# Altium PCB 175-00024_rev1, Backplane, 19-inch Rack_OLD.PcbDoc (part 2 of 3)
Units mil, origin at the board's own origin, x right, y up, seen from the top; angles counter-clockwise.
Board outline 8400 x 10183.07 mil, 7 copper layers (Top Layer (*.GTL), Mid-Layer 1, +24V, RTN, +12V, Signal GND, Bottom Layer); 183 components, 151 nets, 1419 pads, 357 vias.
Unrouted connection lines stored in the file: 135.
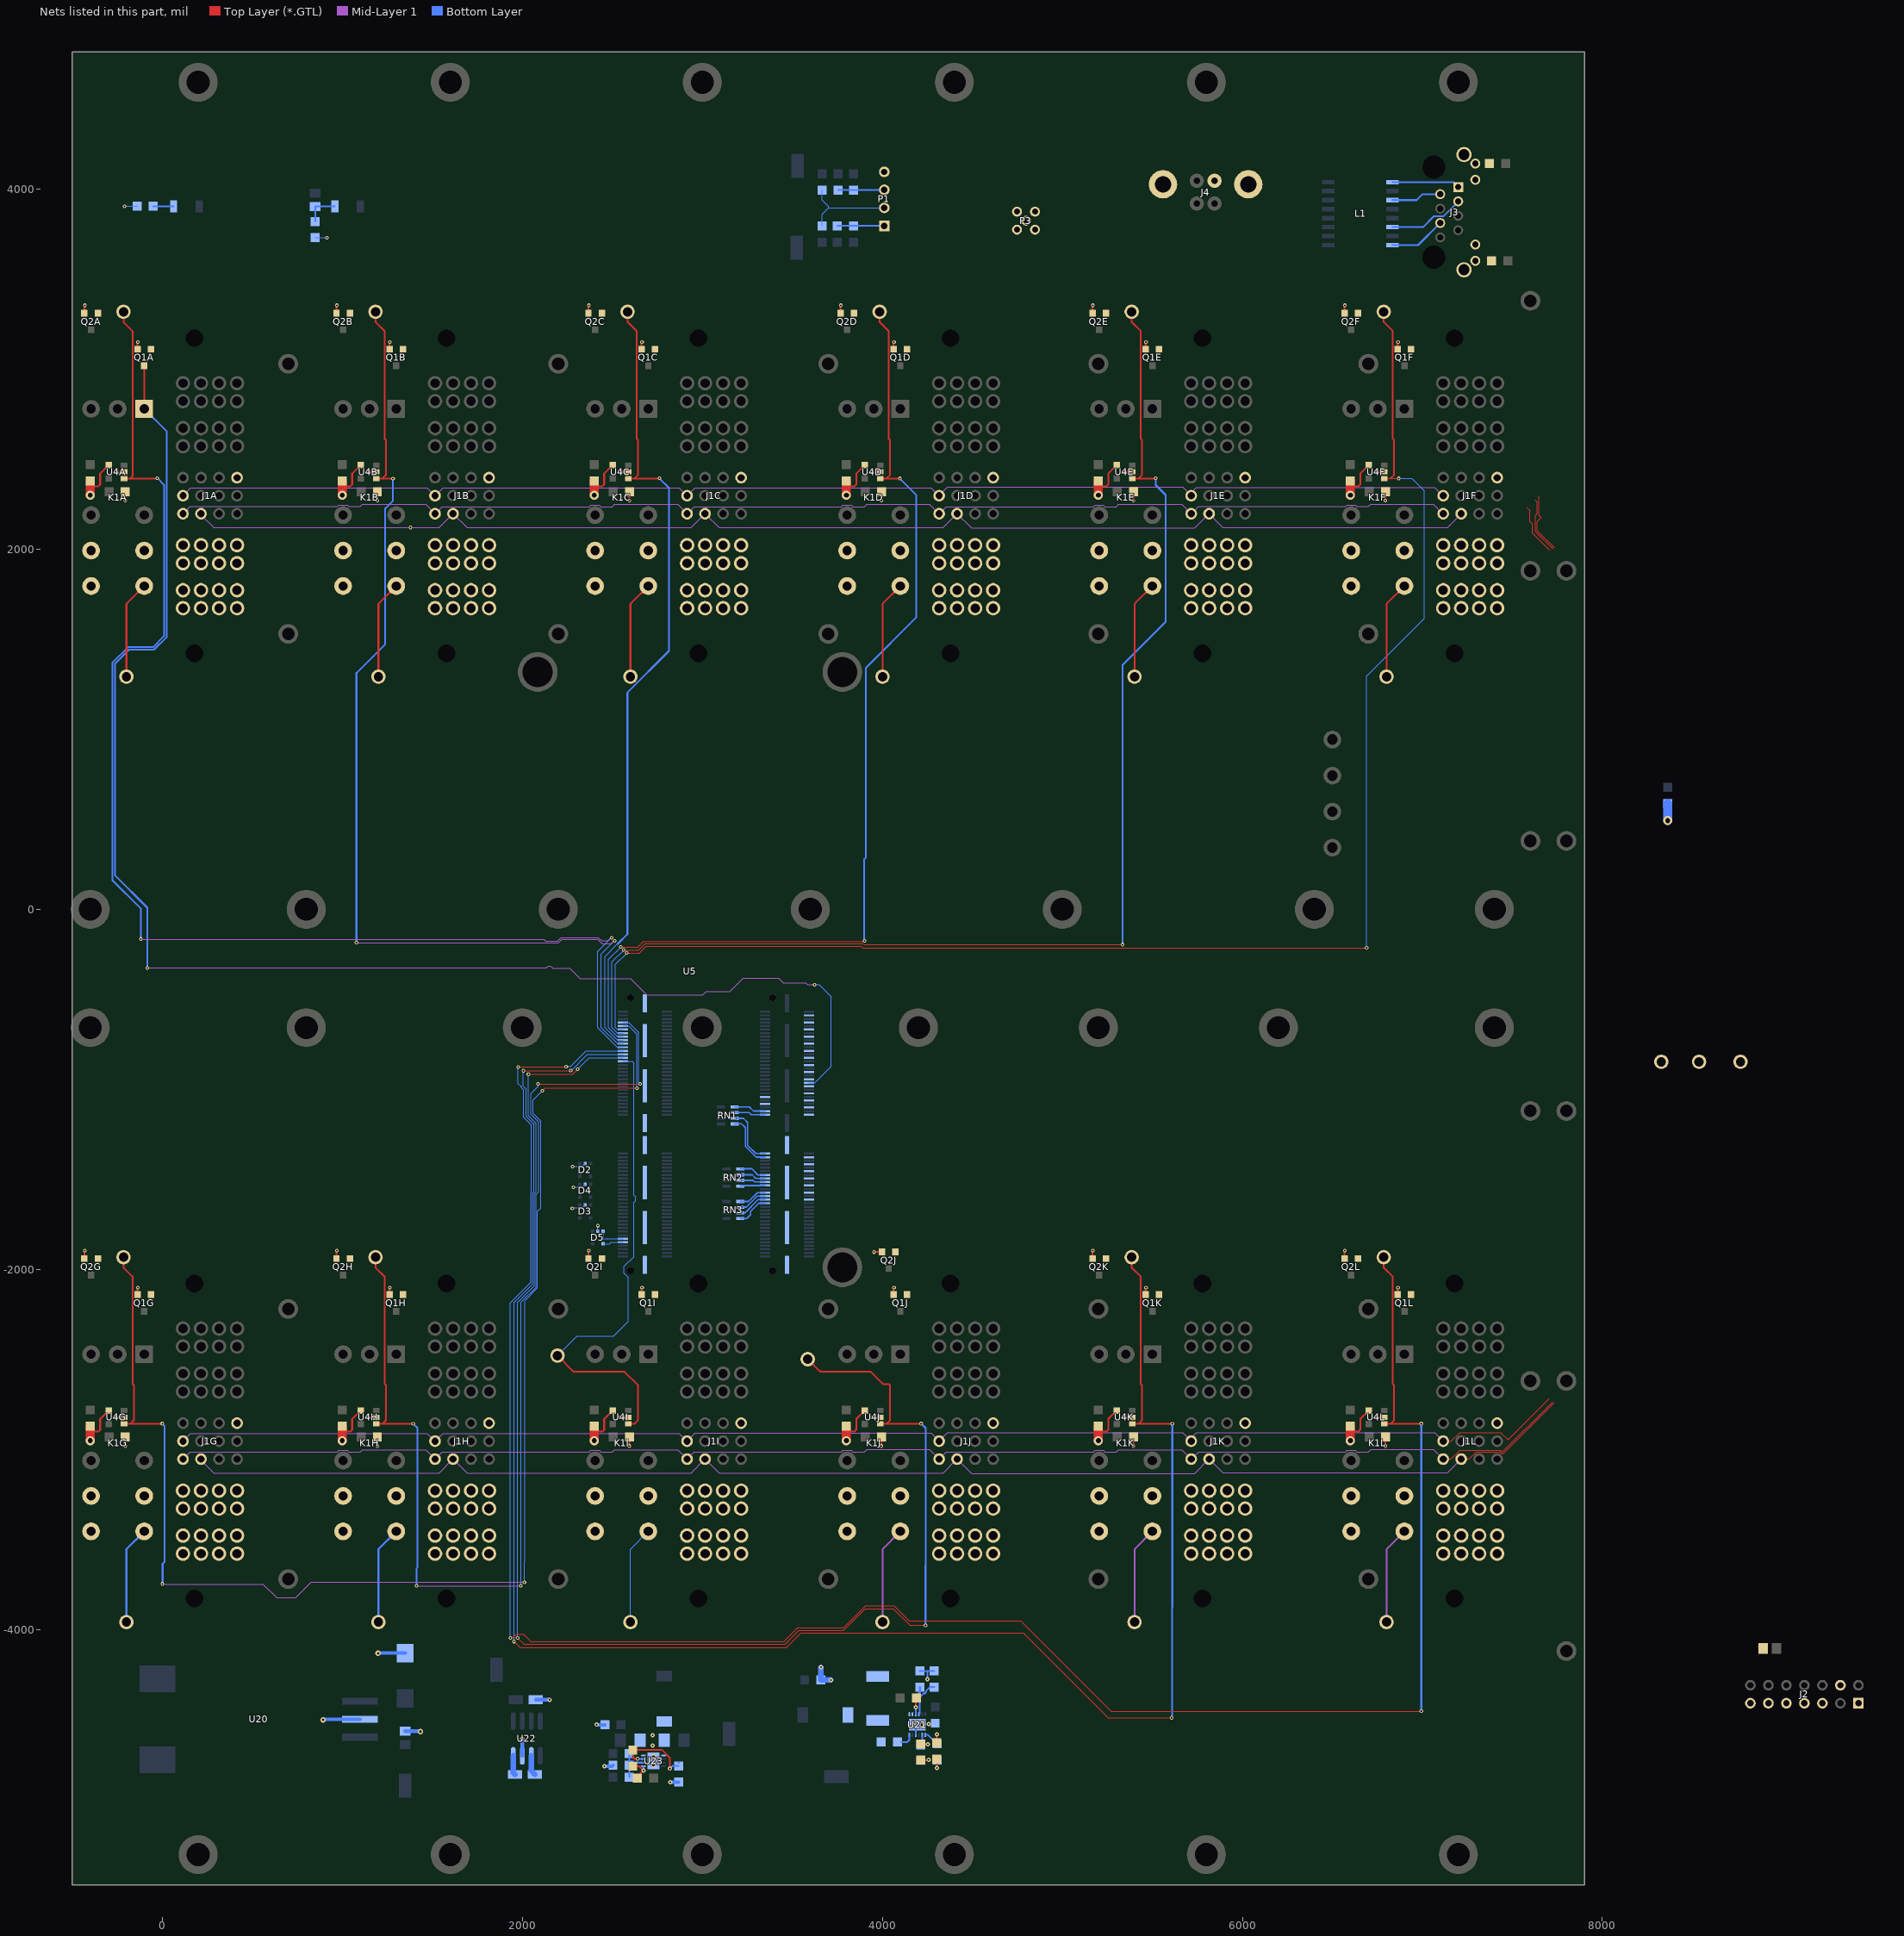
[diagram p7: the nets of this part, all layers, seen from the top]

## Via types
v1: diameter 20, hole 10, Top Layer (*.GTL) to Bottom Layer, 213 vias
v2: diameter 50, hole 28, Top Layer (*.GTL) to Bottom Layer, 87 vias
v3: diameter 24, hole 10, Top Layer (*.GTL) to Bottom Layer, 50 vias
v4: diameter 25.98, hole 12.99, Top Layer (*.GTL) to Bottom Layer, tented top, 4 vias
v5: diameter 30, hole 15, Top Layer (*.GTL) to Bottom Layer, 3 vias

## Nets (pads, with @x,y where several pads share a name; then routed paths per layer and width w, separated by ;. In a path a pad name is that pad's centre, name@x,y a point inside that pad or via, vN(x,y) a via of type N, cw(c..) or ccw(c..) an arc to the next point about the centre after c; other vN are vias at no path point) (continued)
GND: C2A.1 C2B.1 C2C.1 C2D.1 C2E.1 C2F.1 C2G.1 C2H.1 C2I.1 C2J.1 C2K.1 C2L.1 C3.1 C4.1 C10.2 C12.NEG C13.1 C14.1 C15.1 C16.1 C18.1 C19.1 D2.2 D3.2 D4.2 D5.2 J1A.12 J1B.12 J1C.12 J1D.12 J1E.12 J1F.12 J1G.12 J1H.12 J1I.12 J1J.12 J1K.12 J1L.12 J2.1 J2.4 J2.7 J2.9 J2.11 J2.13 J3.10 J3.11 J3.13 J3.14 J4.4 J4.5 J4.6 P1.2 P1.4 P3.2 P3.3 P3.4 P3.5 Q1A.2 Q1B.2 Q1C.2 Q1D.2 Q1E.2 Q1F.2 Q1G.2 Q1H.2 Q1I.2 Q1J.2 Q1K.2 Q1L.2 Q2A.2 Q2B.2 Q2C.2 Q2D.2 Q2E.2 Q2F.2 Q2G.2 Q2H.2 Q2I.2 Q2J.2 Q2K.2 Q2L.2 R1.2 R2.1 R3.1 R30.1 R31.1 R34.1 R38.1 R39.1 R40.1 TP1.1 TP2.1 TP3.1 U4A.2 U4B.2 U4C.2 U4D.2 U4E.2 U4F.2 U4G.2 U4H.2 U4I.2 U4J.2 U4K.2 U4L.2 U5.A121 U5.A122 U5.B4 U5.B8 U5.B12 U5.B16 U5.B20 U5.B24 U5.B28 U5.B32 U5.B36 U5.B40 U5.B44 U5.B48 U5.B49 U5.B52 U5.B53 U5.B56 U5.B60 U5.B64 U5.B68 U5.B72 U5.B76 U5.B80 U5.B84 U5.B88 U5.B122 U20.2 U21.4 U21.13 U22.3 U23.8 U23.9 | length 4356.3
  Top Layer (*.GTL) w10: Q2G.2@-432.41,-1940 v1@-432.41,-1898.66 ; Q2A.2@-432.4,3311.18 v1@-432.4,3352.52 ; v1(-260.01,-2821.26) U4G.2@-212.01,-2821.26 ; v1(-260,2429.92) U4A.2@-212,2429.92 ; v1(-205.01,-2981.26) C2G.1@-205.01,-2931.26 ; v1(-205,2269.92) C2A.1@-205,2319.92 ; Q1G.2@-137.41,-2140 -137.41,-2103.66 v1(-135.01,-2101.26) ; Q1A.2@-137.4,3111.18 -137.4,3147.52 v1(-135,3149.92) ; Q2H.2@967.59,-1940 v1@967.59,-1898.66 ; Q2B.2@967.6,3311.18 v1@967.6,3352.52 ; v1(1139.99,-2821.26) U4H.2@1187.99,-2821.26 ; v1(1140,2429.92) U4B.2@1188,2429.92 ; v1(1194.99,-2981.26) C2H.1@1194.99,-2931.26 ; v1(1195,2269.92) C2B.1@1195,2319.92 ; Q1H.2@1262.59,-2140 1262.59,-2103.66 v1(1264.99,-2101.26) ; Q1B.2@1262.6,3111.18 1262.6,3147.52 v1(1265,3149.92) ; Q2I.2@2367.59,-1940 v1@2367.59,-1898.66 ; Q2C.2@2367.6,3311.18 v1@2367.6,3352.52 ; v1(2539.99,-2821.26) U4I.2@2587.99,-2821.26 ; v1(2540,2429.92) U4C.2@2588,2429.92 ; v1(2594.99,-2981.26) C2I.1@2594.99,-2931.26 ; v1(2595,2269.92) C2C.1@2595,2319.92 ; Q1I.2@2662.59,-2140 2662.59,-2103.66 v1(2664.99,-2101.26) ; Q1C.2@2662.6,3111.18 2662.6,3147.52 v1(2665,3149.92) ; Q2D.2@3767.6,3311.18 v1@3767.6,3352.52 ; v1(3939.99,-2821.26) U4J.2@3987.99,-2821.26 ; v1(3940,2429.92) U4D.2@3988,2429.92 ; v1(3954.5,-1903.94) 3955.76,-1902.68 Q2J.2@3998.1,-1902.68 ; v1(3994.99,-2981.26) C2J.1@3994.99,-2931.26 ; v1(3995,2269.92) C2D.1@3995,2319.92 ; Q1J.2@4062.59,-2140 4062.59,-2103.66 v1(4064.99,-2101.26) ; Q1D.2@4062.6,3111.18 4062.6,3147.52 v1(4065,3149.92) ; R34.1@4213.8,-4725.73 4255.8,-4725.73 v3(4256.8,-4724.73) ; C14.1@4301.8,-4630.73 4301.8,-4584.73 v3(4302.8,-4583.73) ; Q2K.2@5167.59,-1940 v1@5167.59,-1898.66 ; Q2E.2@5167.6,3311.18 v1@5167.6,3352.52 ; v1(5339.99,-2821.26) U4K.2@5387.99,-2821.26 ; v1(5340,2429.92) U4E.2@5388,2429.92 ; v1(5394.99,-2981.26) C2K.1@5394.99,-2931.26 ; v1(5395,2269.92) C2E.1@5395,2319.92 ; Q1K.2@5462.59,-2140 5462.59,-2103.66 v1(5464.99,-2101.26) ; Q1E.2@5462.6,3111.18 5462.6,3147.52 v1(5465,3149.92) ; Q2L.2@6567.59,-1940 v1@6567.59,-1898.66 ; Q2F.2@6567.6,3311.18 v1@6567.6,3352.52 ; v1(6739.99,-2821.26) U4L.2@6787.99,-2821.26 ; v1(6740,2429.92) U4F.2@6788,2429.92 ; v1(6794.99,-2981.26) C2L.1@6794.99,-2931.26 ; v1(6795,2269.92) C2F.1@6795,2319.92 ; Q1L.2@6862.59,-2140 6862.59,-2103.66 v1(6864.99,-2101.26) ; Q1F.2@6862.6,3111.18 6862.6,3147.52 v1(6865,3149.92)
  Bottom Layer w5: v1(-210,3905) R3.1@-140,3905 ; R2.1@850,3730 v1(915,3730) ; v1(2278,-1661.48) 2280.66,-1658.82 2332.53,-1658.82 2348.88,-1642.48 D3.2@2349.53,-1642.48 D3.2@2349.53,-1647.95 ; v1(2279,-1429.48) 2279.66,-1428.82 2332.53,-1428.82 2348.88,-1412.48 D2.2@2349.53,-1412.48 D2.2@2349.53,-1417.95 ; v1(2283,-1544.48) 2283.66,-1543.82 2332.53,-1543.82 2348.88,-1527.48 D4.2@2349.53,-1527.48 D4.2@2349.53,-1532.95 ; D5.2@2419.53,-1787.48 v1(2419.53,-1757.95) ; C3.1@3665,3795 3665,3860 3701,3896 ; C4.1@3665,3995 3665,3940 3701,3904 3701,3896 ; P1.2@4011,3896 3701,3896
  Bottom Layer w10: U21.4@4185.65,-4585.73 4185.65,-4537.51 U21.13@4194.51,-4528.65 ; R30.1@4208.8,-4230.73 4249.8,-4230.73 ; v3(4249.8,-4277.73) 4249.8,-4230.73 ; R31.1@4288.8,-4230.73 4249.8,-4230.73
  Bottom Layer w20: v5(894,-4502.48) 897.4,-4499.08 U20.2@1098,-4499.08 ; v5(1199,-4132.48) 1200,-4131.48 C12.NEG@1349,-4131.48 ; C10.2@1349,-4565.08 1431.6,-4565.08 v5(1434,-4567.48) ; U22.3@2000,-4701.94 v3(2000,-4607.48) ; C16.1@2075,-4390.48 v3(2152,-4390.48) ; v3(2412.98,-4529.08) 2413.98,-4530.08 R38.1@2458.98,-4530.08 ; v3(2456.98,-4760.08) 2498.98,-4760.08 R39.1@2503.98,-4755.08 ; v3(2821.98,-4848.08) R40.1@2867.98,-4848.08
  Bottom Layer w30: v3(3658.8,-4210.73) C13.1@3658.8,-4280.73 v3(3713.8,-4280.73)
  Bottom Layer w50: v2(8363,492.52) R1.2@8363,587.52
  other v1: -430.01,-1896.26 969.99,-1896.26 2369.99,-1896.26 5169.99,-1896.26 6569.99,-1896.26 -430,3354.92 970,3354.92 2370,3354.92 3770,3354.92 5170,3354.92 6570,3354.92
  other v3: 2725,-4645.08 2724,-4588.08 4258.8,-4525.73
  other v4: 2728.98,-4753.7 2728.98,-4706.46 4170.89,-4528.65 4218.13,-4528.65
GPS_DATA: J1A.1 J1B.1 J1C.1 J1D.1 J1E.1 J1F.1 J1G.1 J1H.1 J1I.1 J1J.1 J1K.1 J1L.1 P3.1 | length 15569.8
  Top Layer (*.GTL) w5: J1L.1@7115.5,-3053.94 7160.35,-3053.94 7208.35,-3005.94 7435.38,-3005.94 7444.38,-3014.94 7445,-3014.94 7723.73,-2736.21 ; 7624.84,2274.36 7638.43,2260.77 7638.43,2196.95 7629.09,2187.61 7629.09,2097.88 7631.73,2095.25 7723.73,2003.25
  Mid-Layer 1 w5: J1G.1@115.5,-3053.94 155.78,-3013.66 974.07,-3013.66 981.64,-3006.1 1027.79,-3006.1 1035.35,-3013.66 1100.92,-3013.66 1112.92,-3001.66 1463.22,-3001.66 J1H.1@1515.5,-3053.94 1554.78,-3014.66 2373.07,-3014.66 2381.64,-3006.1 2427.79,-3006.1 2436.35,-3014.66 2499.92,-3014.66 2512.16,-3002.43 2863.99,-3002.43 J1I.1@2915.5,-3053.94 2954.78,-3014.66 3773.07,-3014.66 3781.64,-3006.1 3827.79,-3006.1 3836.35,-3014.66 3899.92,-3014.66 3913.92,-3000.66 4262.22,-3000.66 J1J.1@4315.5,-3053.94 4354.78,-3014.66 5173.07,-3014.66 5181.64,-3006.1 5227.79,-3006.1 5236.35,-3014.66 5299.92,-3014.66 5312.92,-3001.66 5663.22,-3001.66 J1K.1@5715.5,-3053.94 5755.78,-3013.66 6574.07,-3013.66 6581.64,-3006.1 6627.79,-3006.1 6635.35,-3013.66 6700.92,-3013.66 6713.92,-3000.66 7062.22,-3000.66 J1L.1@7115.5,-3053.94 ; J1A.1@115.51,2197.24 155.79,2237.52 974.08,2237.52 981.65,2245.08 1027.8,2245.08 1035.36,2237.52 1100.93,2237.52 1112.93,2249.52 1463.24,2249.52 J1B.1@1515.51,2197.24 1554.79,2236.52 2373.08,2236.52 2381.65,2245.08 2427.8,2245.08 2436.36,2236.52 2499.93,2236.52 2512.17,2248.76 2864,2248.76 J1C.1@2915.51,2197.24 2954.79,2236.52 3773.08,2236.52 3781.65,2245.08 3827.8,2245.08 3836.36,2236.52 3899.93,2236.52 3913.93,2250.52 4262.24,2250.52 J1D.1@4315.51,2197.24 4354.79,2236.52 5173.08,2236.52 5181.65,2245.08 5227.8,2245.08 5236.36,2236.52 5299.93,2236.52 5312.93,2249.52 5663.24,2249.52 J1E.1@5715.51,2197.24 5755.79,2237.52 6574.08,2237.52 6581.65,2245.08 6627.8,2245.08 6635.36,2237.52 6700.93,2237.52 6713.93,2250.52 7062.24,2250.52 J1F.1@7115.51,2197.24
I2C_SCL: D5.4 J1A.5 J1B.5 J1C.5 J1D.5 J1E.5 J1F.5 J1G.5 J1H.5 J1I.5 J1J.5 J1K.5 J1L.5 U5.A111 | length 15510.9
  Top Layer (*.GTL) w5: J1L.5@7115.5,-2953.94 7160.35,-2953.94 7208.35,-2905.94 7435.38,-2905.94 7474.38,-2944.94 7476.82,-2944.94 7704.64,-2717.12 ; 7581,2230.52 7596,2215.52 7596,2154.52 7611.09,2139.43 7611.09,2090.43 7613.73,2087.79 7616.36,2085.16 7619,2082.52 7704.64,1996.88
  Mid-Layer 1 w5: J1G.5@115.5,-2953.94 158.78,-2910.66 1472.22,-2910.66 J1H.5@1515.5,-2953.94 1558.78,-2910.66 2872.22,-2910.66 J1I.5@2915.5,-2953.94 2959.78,-2909.66 4271.22,-2909.66 J1J.5@4315.5,-2953.94 4362.78,-2906.66 5668.22,-2906.66 J1K.5@5715.5,-2953.94 5715.5,-2936.15 5743.99,-2907.66 7069.22,-2907.66 J1L.5@7115.5,-2953.94 ; J1A.5@115.51,2297.24 158.79,2340.52 1472.24,2340.52 J1B.5@1515.51,2297.24 1558.79,2340.52 2872.24,2340.52 J1C.5@2915.51,2297.24 2959.79,2341.52 4271.24,2341.52 J1D.5@4315.51,2297.24 4362.79,2344.52 5668.24,2344.52 J1E.5@5715.51,2297.24 5715.51,2315.03 5744,2343.52 7069.24,2343.52 J1F.5@7115.51,2297.24
  Bottom Layer w5: D5.4@2449.06,-1858.35 2484.13,-1858.35 2493.31,-1849.17 U5.A111@2559.12,-1849.17
I2C_SDA: D5.3 J1A.2 J1B.2 J1C.2 J1D.2 J1E.2 J1F.2 J1G.2 J1H.2 J1I.2 J1J.2 J1K.2 J1L.2 U5.A109 | length 15802.9
  Top Layer (*.GTL) w5: J1L.2@7215.5,-3053.94 7260.35,-3053.94 7299.35,-3014.94 7431.65,-3014.94 7440.65,-3023.94 7448.73,-3023.94 7730.09,-2742.57 7732.73,-2739.94 ; 7646.76,2296.28 7646.76,2265.17 7647.43,2264.5 7647.43,2193.22 7646.76,2192.55 7646.76,2188.61 7659.64,2175.73 7638.09,2154.19 7638.09,2101.61 7730.09,2009.61 7732.73,2006.98
  Mid-Layer 1 w5: J1G.2@215.5,-3053.94 215.5,-3061.17 285.99,-3131.66 1537.78,-3131.66 J1H.2@1615.5,-3053.94 1693.22,-3131.66 2937.78,-3131.66 J1I.2@3015.5,-3053.94 3093.22,-3131.66 4337.78,-3131.66 J1J.2@4415.5,-3053.94 4495.22,-3133.66 5735.78,-3133.66 J1K.2@5815.5,-3053.94 5891.99,-3130.43 7139.01,-3130.43 J1L.2@7215.5,-3053.94 ; J1A.2@215.51,2197.24 215.51,2190.01 286,2119.52 1537.79,2119.52 J1B.2@1615.51,2197.24 1693.24,2119.52 2937.79,2119.52 J1C.2@3015.51,2197.24 3093.24,2119.52 4337.79,2119.52 J1D.2@4415.51,2197.24 4495.24,2117.52 5735.79,2117.52 J1E.2@5815.51,2197.24 5892,2120.76 7139.02,2120.76 J1F.2@7215.51,2197.24
  Bottom Layer w5: 2449.06,-1828.54 D5.3@2449.06,-1787.48 ; 2450,-1829.49 2476.99,-1829.49 ; 2476.99,-1828.47 2476.99,-1829.49 ; U5.A109@2559.12,-1829.49 2476.99,-1829.49
  other v1: 1380,2120.52
IMON_SLOT1: TP11A.1 U4A.1 U5.A21 | length 7336.1
  Top Layer (*.GTL) w10: TP11A.1@-215,3318.92 -215,3261.56 -164.5,3211.06 -164.5,2405.42 -177,2392.92 ; U4A.1@-212,2392.92 -177,2392.92 ; v1(-27,2395) -29.08,2392.92 -177,2392.92
  Mid-Layer 1 w5: v1@-118,-166 2119,-166 2129,-176 2197.38,-176 2216.38,-157 2422,-157 2440,-175 2476,-175 2492.85,-158.15 v1(2496.15,-158.15)
  Bottom Layer w5: v1(2496.15,-158.15) 2419.57,-234.72 2419.57,-658.07 2528,-766.5 U5.A21@2559.12,-766.5
  Bottom Layer w10: v1(-118,-165) -118,3 -277,162 -277,1368.8 -189.8,1456 -50.8,1456 10,1516.8 10,2358 v1(-27,2395)
IMON_SLOT2: TP11B.1 U4B.1 U5.A19 | length 5843.3
  Top Layer (*.GTL) w10: TP11B.1@1185,3318.92 1185,3261.56 1235.5,3211.06 1235.5,2614.42 1243,2606.92 1243,2412.92 1223,2392.92 ; U4B.1@1188,2392.92 1223,2392.92 ; v1(1282,2392) 1281.08,2392.92 1223,2392.92
  Mid-Layer 1 w5: v1@1079,-186 2201.52,-186 2220.52,-167 2417.86,-167 2442.83,-191.97 2492.97,-191.97 2509.82,-175.12 v1(2513.12,-175.12)
  Bottom Layer w5: v1(2513.12,-175.12) 2439.26,-248.98 2439.26,-658.07 2528,-746.81 U5.A19@2559.12,-746.81
  Bottom Layer w10: v1(1079,-185) 1079,1312 1239,1472 1239,2226 1282,2269 v1(1282,2392)
IMON_SLOT3: TP11C.1 U4C.1 U5.A17 | length 4483
  Top Layer (*.GTL) w10: TP11C.1@2585,3318.92 2585,3261.56 2635.5,3211.06 2635.5,2614.42 2643,2606.92 2643,2412.92 2623,2392.92 ; U4C.1@2588,2392.92 2623,2392.92 ; v1(2762,2394) 2760.92,2392.92 2623,2392.92
  Bottom Layer w5: 2530.09,-192.09 2458.94,-263.23 2458.94,-658.07 2528,-727.13 U5.A17@2559.12,-727.13
  Bottom Layer w10: 2530.09,-192.09 2584,-138.18 2584,1203.8 2815,1434.8 2815,2341 v1(2762,2394)
IMON_SLOT4: TP11D.1 U4D.1 U5.A15 | length 5738.7
  Top Layer (*.GTL) w5: v1(2547.06,-209.06) 2641.51,-209.06 2672.57,-178 v1@3901,-178
  Top Layer (*.GTL) w10: TP11D.1@3985,3318.92 3985,3261.56 4035.5,3211.06 4035.5,2614.42 4043,2606.92 4043,2412.92 4023,2392.92 ; U4D.1@3988,2392.92 4023,2392.92 ; v1(4097,2393) 4096.92,2392.92 4023,2392.92
  Bottom Layer w5: v1(2547.06,-209.06) 2478.63,-277.49 2478.63,-658.07 2528,-707.44 U5.A15@2559.12,-707.44
  Bottom Layer w10: v1(3901,-175) 3899,-173 3899,278 3909,288 3909,1341.8 4188,1620.8 4188,2302 v1(4097,2393)
IMON_SLOT5: TP11E.1 U4E.1 U5.A13 | length 7121.7
  Top Layer (*.GTL) w5: v1(2564.03,-226.03) 2645.76,-226.03 2681.79,-190 3891.73,-190 3897.73,-196 v1(5334,-196)
  Top Layer (*.GTL) w10: TP11E.1@5385,3318.92 5385,3261.56 5435.5,3211.06 5435.5,2614.42 5443,2606.92 5443,2412.92 5423,2392.92 ; U4E.1@5388,2392.92 5423,2392.92 ; v1(5519,2394) 5517.92,2392.92 5423,2392.92
  Bottom Layer w5: U5.A13@2559.12,-687.76 2528,-687.76 2498.32,-658.07 2498.32,-291.74 v1(2564.03,-226.03)
  Bottom Layer w10: v1(5334,-196) 5334,1356 5574,1596 5574,2301 5519,2356 v1(5519,2394)
IMON_SLOT6: TP11F.1 U4F.1 U5.A11 | length 8495.1
  Top Layer (*.GTL) w5: v1(2581,-243) 2650,-243 2687,-206 3884.46,-206 3892.46,-214 v1(6690,-214) v1@6691,-214 ; U4F.1@6788,2392.92 6823,2392.92 6868.92,2392.92 v1(6869,2393)
  Top Layer (*.GTL) w10: TP11F.1@6785,3318.92 6785,3261.56 6835.5,3211.06 6835.5,2614.42 6843,2606.92 6843,2412.92 6823,2392.92
  Bottom Layer w5: U5.A11@2559.12,-668.07 2528,-668.07 2518,-658.07 2518,-306 v1(2581,-243) ; v1(6690,-214) 6691,-213 6691,1296 7010,1615 7010,2325 6942,2393 v1(6869,2393)
IMON_SLOT7: TP11G.1 U4G.1 U5.A9 | length 7883.2
  Top Layer (*.GTL) w5: v1(2112,-1008) 2113,-1008 2128,-993 v1(2638,-993)
  Top Layer (*.GTL) w10: TP11G.1@-215.01,-1932.26 -215.01,-1989.62 -164.51,-2040.12 -164.51,-2636.76 -157.01,-2644.26 -157.01,-2838.26 -177.01,-2858.26 ; U4G.1@-212.01,-2858.26 -177.01,-2858.26 ; v1(0,-2857) -1.26,-2858.26 -177.01,-2858.26
  Mid-Layer 1 w5: v1@1,-3748 560.54,-3748 635.54,-3823 742.27,-3823 827.07,-3738.2 v1(2011.8,-3738.2)
  Bottom Layer w5: v1(2011.8,-3738.2) 2011.8,-3623.2 2014,-3621 2014,-2173.82 2084.77,-2103.05 2084.77,-1678.05 2103,-1659.82 2103,-1177 2060,-1134 2060,-1060 v1(2112,-1008) ; U5.A9@2559.12,-648.39 2591,-648.39 2636.68,-694.06 2636.68,-992.32 2637.35,-993 v1(2638,-993)
  Bottom Layer w10: v1(0,-2857) 12,-2869 12,-3626.13 2,-3636.13 2,-3746 v1(1,-3747)
IMON_SLOT8: TP11H.1 U4H.1 U5.A7 | length 6485.4
  Top Layer (*.GTL) w5: v1(2088,-970) v1(2654,-970)
  Top Layer (*.GTL) w10: TP11H.1@1184.99,-1932.26 1184.99,-1989.62 1235.49,-2040.12 1235.49,-2636.76 1242.99,-2644.26 1242.99,-2838.26 1222.99,-2858.26 ; U4H.1@1187.99,-2858.26 1222.99,-2858.26 ; v1(1394.74,-2858.26) 1222.99,-2858.26
  Mid-Layer 1 w5: v1@1412,-3758 v1(1992,-3758)
  Bottom Layer w5: v1(1992,-3758) 1994,-3756 1994,-3621 1994,-2181.09 2075.77,-2099.32 2075.77,-1584.23 2090,-1570 2090,-1182.38 2047,-1139.38 2047,-1023 2088,-982 v1(2088,-970) ; U5.A7@2559.12,-628.7 2591,-628.7 2645.68,-683.38 2645.68,-963 2652.68,-970 v1(2654,-970)
  Bottom Layer w10: v1(1394.74,-2858.26) 1418,-2881.52 1418,-3655.13 1412,-3661.13 v1(1412,-3757)
IMON_SLOT9: TP11I.1 U4I.1 U5.A29 | length 2784.6
  Top Layer (*.GTL) w10: TP11I.1@2195.5,-2478.94 2285.5,-2568.94 2567.67,-2568.94 2642.99,-2644.26 2642.99,-2838.26 2622.99,-2858.26 U4I.1@2587.99,-2858.26
  Bottom Layer w5: TP11I.1@2195.5,-2478.94 2303.44,-2371 2508,-2371 2589.5,-2289.5 2589.5,-2045.62 2564.88,-2021 2564.88,-1983.71 2619,-1929.59 2619,-1628.33 2628.5,-1618.83 2628.5,-1595.67 2621,-1588.17 2621,-857 2609.24,-845.24 U5.A29@2559.12,-845.24
IMON_SLOT10: TP11J.1 U4J.1 U5.A27 | length 8254.5
  Top Layer (*.GTL) w5: v1(1973.8,-4047.2) 2008.6,-4082 3459,-4082 3536,-4005 3785,-4005 3905.54,-3884.46 4061,-3884.46 4153.82,-3977.27 v1@4240,-3977.27 ; v1(2034,-916) 2035,-915 2281.16,-915 v1(2307.32,-888.85)
  Top Layer (*.GTL) w10: TP11J.1@3585.5,-2498.94 3655.5,-2568.94 3935.5,-2568.94 4003.32,-2636.76 4035.49,-2636.76 4042.99,-2644.26 4042.99,-2838.26 4022.99,-2858.26 ; U4J.1@3987.99,-2858.26 4022.99,-2858.26 ; v1(4216,-2857) 4214.74,-2858.26 4022.99,-2858.26
  Bottom Layer w5: v1(1973.8,-4047.2) 1973.8,-3897.2 1974,-3897 1974,-2183.77 2066.77,-2090.99 2066.77,-1580.23 2077,-1570 2077,-1187.77 2034,-1144.77 v1(2034,-916) ; v1(2307.32,-888.85) 2370.61,-825.55 U5.A27@2559.12,-825.55
  Bottom Layer w10: v1(4216,-2857) 4241,-2882 4241,-3643.13 4240,-3644.13 v1(4240,-3977)
IMON_SLOT11: TP11K.1 U4K.1 U5.A25 | length 10544.1
  Top Layer (*.GTL) w5: v1(1954,-4067) 1989,-4102 3467.28,-4102 3549.28,-4020 4783,-4020 5255,-4492 v1@5608,-4492 ; v1(2006,-897) 2007,-896 v1(2269,-896)
  Top Layer (*.GTL) w10: TP11K.1@5384.99,-1932.26 5384.99,-1989.62 5435.49,-2040.12 5435.49,-2636.76 5442.99,-2644.26 5442.99,-2838.26 5422.99,-2858.26 ; U4K.1@5387.99,-2858.26 5422.99,-2858.26 ; v1(5611,-2858) 5610.74,-2858.26 5422.99,-2858.26
  Bottom Layer w5: v1(1954,-4067) 1954,-2185.38 2057.77,-2081.61 2057.77,-1576.23 2064,-1570 2064,-1193.15 2021,-1150.15 2021,-997 2006,-982 v1(2006,-897) ; v1(2269,-896) 2272.32,-896 2362.46,-805.87 U5.A25@2559.12,-805.87
  Bottom Layer w10: v1(5608,-4491) 5609,-4490 5609,-3876 5611,-3874 v1(5611,-2858)
IMON_SLOT12: TP11L.1 U4L.1 U5.A23 | length 12039.2
  Top Layer (*.GTL) w5: v1(1934.2,-4047.2) 1945.51,-4047.2 1965.51,-4027.2 2006.49,-4027.2 2047.14,-4067.86 3453.14,-4067.86 3530.14,-3990.86 3785,-3990.86 3907.86,-3868 4064.73,-3868 4149,-3952.27 4768.63,-3952.27 5270.36,-4454 v1(6994,-4454) ; v1@1978,-875 v1@2243,-875
  Top Layer (*.GTL) w10: TP11L.1@6784.99,-1932.26 6784.99,-1989.62 6835.49,-2040.12 6835.49,-2636.76 6842.99,-2644.26 6842.99,-2838.26 6822.99,-2858.26 ; U4L.1@6787.99,-2858.26 6822.99,-2858.26 ; v1(6994,-2857) 6992.74,-2858.26 6822.99,-2858.26
  Bottom Layer w5: v1(1934.2,-4047.2) 1934.2,-3897.2 1934,-3897 1934,-2187 2048.77,-2072.23 2048.77,-1572.23 2051,-1570 2051,-1198.54 2008,-1155.54 2008,-1002.38 1993,-987.38 1993,-984 1977,-968 v1(1977,-876) ; v1(2244,-874) 2245.46,-872.54 2267.94,-872.54 2354.3,-786.18 U5.A23@2559.12,-786.18
  Bottom Layer w10: v1(6994,-4454) v1(6994,-2857)
MANUAL_PWR_OFF: C1.2 Q1A.1 Q1B.1 Q1C.1 Q1D.1 Q1E.1 Q1F.1 Q1G.1 Q1H.1 Q1I.1 Q1J.1 Q1K.1 Q1L.1 R2.2 S1.2 | length 192.1
  Bottom Layer w10: R2.2@850,3820 C1.2@850,3902.6 851.32,3903.92 S1.2@959,3903.92
MANUAL_PWR_ON: Q2A.1 Q2B.1 Q2C.1 Q2D.1 Q2E.1 Q2F.1 Q2G.1 Q2H.1 Q2I.1 Q2J.1 Q2K.1 Q2L.1 R3.2 S2.2 | length 113.4
  Bottom Layer w10: R3.2@-50,3905 -48.92,3903.92 S2.2@63,3903.92
NetC11_1: C11.1 D1.2 L2.1 U21.8
NetC11_2: C11.2 U21.6 | length 79.7
  Bottom Layer w10: C11.2@4103.8,-4625.73 4138.8,-4625.73 4150.22,-4614.32 U21.6@4150.22,-4585.73
NetC14_2: C14.2 R33.1 | length 93.8
  Top Layer (*.GTL) w10: C14.2@4301.8,-4720.73 4303.8,-4722.73 v3(4303.8,-4769.73)
  Bottom Layer w10: v3(4303.8,-4769.73) R33.1@4303.8,-4725.73
NetC17_1: C17.1 U22.2 | length 111.8
  Bottom Layer w30: U22.2@2050,-4701.94 2050,-4785.48 C17.1@2070,-4805.48
NetC17_2: C17.2 U22.4 | length 107.7
  Bottom Layer w30: U22.4@1950,-4701.94 1950,-4795.48 C17.2@1960,-4805.48
NetC20_1: C20.1 R36.1 R39.2 U23.6 | length 215.7
  Bottom Layer w10: C20.1@2593.98,-4820.08 R39.2@2593.98,-4755.08 ; R36.1@2593.98,-4690.08 R39.2@2593.98,-4755.08 ; U23.6@2673.37,-4739.92 2609.14,-4739.92 R39.2@2593.98,-4755.08
NetD1_1: D1.1 U21.7
NetJ1A_13: J1A.13 J1A.14 K1A.14 TP10A.1 | length 3268.5
  Top Layer (*.GTL) w10: TP10A.1@-199,1291.92 -199,1696.67 ; TP10A.1@-199,1291.92 -199,1696.67 ; TP10A.1@-199,1291.92 -199,1696.67 ; TP10A.1@-199,1291.92 -199,1696.67 ; TP10A.1@-199,1291.92 -199,1696.67 ; TP10A.1@-199,1291.92 -199,1696.67 ; -199,1696.67 K1A.14@-100,1795.67 ; -199,1696.67 K1A.14@-100,1795.67 ; -199,1696.67 K1A.14@-100,1795.67 ; -199,1696.67 K1A.14@-100,1795.67 ; -199,1696.67 K1A.14@-100,1795.67 ; -199,1696.67 K1A.14@-100,1795.67
NetJ1B_13: J1B.13 J1B.14 K1B.14 TP10B.1 | length 3268.5
  Top Layer (*.GTL) w10: TP10B.1@1201,1291.92 1201,1696.67 ; TP10B.1@1201,1291.92 1201,1696.67 ; TP10B.1@1201,1291.92 1201,1696.67 ; TP10B.1@1201,1291.92 1201,1696.67 ; TP10B.1@1201,1291.92 1201,1696.67 ; TP10B.1@1201,1291.92 1201,1696.67 ; 1201,1696.67 K1B.14@1300,1795.67 ; 1201,1696.67 K1B.14@1300,1795.67 ; 1201,1696.67 K1B.14@1300,1795.67 ; 1201,1696.67 K1B.14@1300,1795.67 ; 1201,1696.67 K1B.14@1300,1795.67 ; 1201,1696.67 K1B.14@1300,1795.67
NetJ1C_13: J1C.13 J1C.14 K1C.14 TP10C.1 | length 3268.5
  Top Layer (*.GTL) w10: TP10C.1@2601,1291.92 2601,1696.67 ; TP10C.1@2601,1291.92 2601,1696.67 ; TP10C.1@2601,1291.92 2601,1696.67 ; TP10C.1@2601,1291.92 2601,1696.67 ; TP10C.1@2601,1291.92 2601,1696.67 ; TP10C.1@2601,1291.92 2601,1696.67 ; 2601,1696.67 K1C.14@2700,1795.67 ; 2601,1696.67 K1C.14@2700,1795.67 ; 2601,1696.67 K1C.14@2700,1795.67 ; 2601,1696.67 K1C.14@2700,1795.67 ; 2601,1696.67 K1C.14@2700,1795.67 ; 2601,1696.67 K1C.14@2700,1795.67
NetJ1D_13: J1D.13 J1D.14 K1D.14 TP10D.1 | length 3268.5
  Top Layer (*.GTL) w10: TP10D.1@4001,1291.92 4001,1696.67 ; TP10D.1@4001,1291.92 4001,1696.67 ; TP10D.1@4001,1291.92 4001,1696.67 ; TP10D.1@4001,1291.92 4001,1696.67 ; TP10D.1@4001,1291.92 4001,1696.67 ; TP10D.1@4001,1291.92 4001,1696.67 ; 4001,1696.67 K1D.14@4100,1795.67 ; 4001,1696.67 K1D.14@4100,1795.67 ; 4001,1696.67 K1D.14@4100,1795.67 ; 4001,1696.67 K1D.14@4100,1795.67 ; 4001,1696.67 K1D.14@4100,1795.67 ; 4001,1696.67 K1D.14@4100,1795.67
NetJ1E_13: J1E.13 J1E.14 K1E.14 TP10E.1 | length 3268.5
  Top Layer (*.GTL) w10: TP10E.1@5401,1291.92 5401,1696.67 ; TP10E.1@5401,1291.92 5401,1696.67 ; TP10E.1@5401,1291.92 5401,1696.67 ; TP10E.1@5401,1291.92 5401,1696.67 ; TP10E.1@5401,1291.92 5401,1696.67 ; TP10E.1@5401,1291.92 5401,1696.67 ; 5401,1696.67 K1E.14@5500,1795.67 ; 5401,1696.67 K1E.14@5500,1795.67 ; 5401,1696.67 K1E.14@5500,1795.67 ; 5401,1696.67 K1E.14@5500,1795.67 ; 5401,1696.67 K1E.14@5500,1795.67 ; 5401,1696.67 K1E.14@5500,1795.67
NetJ1F_13: J1F.13 J1F.14 K1F.14 TP10F.1 | length 3268.5
  Top Layer (*.GTL) w10: TP10F.1@6801,1291.92 6801,1696.67 ; TP10F.1@6801,1291.92 6801,1696.67 ; TP10F.1@6801,1291.92 6801,1696.67 ; TP10F.1@6801,1291.92 6801,1696.67 ; TP10F.1@6801,1291.92 6801,1696.67 ; TP10F.1@6801,1291.92 6801,1696.67 ; 6801,1696.67 K1F.14@6900,1795.67 ; 6801,1696.67 K1F.14@6900,1795.67 ; 6801,1696.67 K1F.14@6900,1795.67 ; 6801,1696.67 K1F.14@6900,1795.67 ; 6801,1696.67 K1F.14@6900,1795.67 ; 6801,1696.67 K1F.14@6900,1795.67
NetJ1G_13: J1G.13 J1G.14 K1G.14 TP10G.1 | length 544.8
  Bottom Layer w12: TP10G.1@-199.01,-3959.26 -199.01,-3554.51 K1G.14@-100.01,-3455.51
NetJ1H_13: J1H.13 J1H.14 K1H.14 TP10H.1 | length 544.8
  Bottom Layer w12: TP10H.1@1200.99,-3959.26 1200.99,-3554.51 K1H.14@1299.99,-3455.51
NetJ1I_13: J1I.13 J1I.14 K1I.14 TP10I.1 | length 544.8
  Bottom Layer w5: TP10I.1@2600.99,-3959.26 2600.99,-3554.51 K1I.14@2699.99,-3455.51
NetJ1J_13: J1J.13 J1J.14 K1J.14 TP10J.1 | length 544.8
  Mid-Layer 1 w10: TP10J.1@4000.99,-3959.26 4000.99,-3554.51 K1J.14@4099.99,-3455.51
NetJ1K_13: J1K.13 J1K.14 K1K.14 TP10K.1 | length 544.8
  Mid-Layer 1 w10: TP10K.1@5400.99,-3959.26 5400.99,-3554.51 K1K.14@5499.99,-3455.51
NetJ1L_13: J1L.13 J1L.14 K1L.14 TP10L.1 | length 544.8
  Mid-Layer 1 w10: TP10L.1@6800.99,-3959.26 6800.99,-3554.51 K1L.14@6899.99,-3455.51
NetJ2_5: J2.5 R5.1
NetJ3_1: J3.1 L1.1 | length 377.2
  Bottom Layer w10: L1.1@6833,4039 7172,4039 J3.1@7199,4012
NetJ3_2: J3.2 L1.3 | length 279.7
  Bottom Layer w10: L1.3@6833,3939 6968,3939 7001,3972 J3.2@7099,3972
NetJ3_3: J3.3 L1.6 | length 425.2
  Bottom Layer w10: L1.6@6833,3789 7003,3789 7062.5,3848.5 7115.5,3848.5 J3.3@7199,3932
NetJ3_6: J3.6 L1.8 | length 316.9
  Bottom Layer w10: L1.8@6833,3689 6976,3689 J3.6@7099,3812
NetJ3_9: J3.9 R6.2
NetJ3_12: J3.12 R7.2
NetK1A_11: K1A.11 R4A.2 U4A.4 | length 1593.7
  Top Layer (*.GTL) w10: -400,2349.92 -355,2349.92 ; -400,2349.92 -355,2349.92 ; -400,2349.92 -355,2349.92 ; -400,2349.92 -355,2349.92 ; -400,2349.92 -355,2349.92 ; -400,2349.92 -355,2349.92 ; -355,2349.92 -345,2359.92 ; -355,2349.92 -345,2359.92 ; -355,2349.92 -345,2359.92 ; -355,2349.92 -345,2359.92 ; -355,2349.92 -345,2359.92 ; -355,2349.92 -345,2359.92 ; -345,2359.92 -345,2419.92 ; -345,2359.92 -345,2419.92 ; -345,2359.92 -345,2419.92 ; -345,2359.92 -345,2419.92 ; -345,2359.92 -345,2419.92 ; -345,2359.92 -345,2419.92 ; -345,2419.92 U4A.4@-298,2466.92 ; -345,2419.92 U4A.4@-298,2466.92 ; -345,2419.92 U4A.4@-298,2466.92 ; -345,2419.92 U4A.4@-298,2466.92 ; -345,2419.92 U4A.4@-298,2466.92 ; -345,2419.92 U4A.4@-298,2466.92
  Top Layer (*.GTL) w50: v2(-400,2299.92) -400,2349.92 ; v2(-400,2299.92) -400,2349.92 ; v2(-400,2299.92) -400,2349.92 ; v2(-400,2299.92) -400,2349.92 ; v2(-400,2299.92) -400,2349.92 ; v2(-400,2299.92) -400,2349.92 ; -400,2349.92 R4A.2@-400,2379.92 ; -400,2349.92 R4A.2@-400,2379.92 ; -400,2349.92 R4A.2@-400,2379.92 ; -400,2349.92 R4A.2@-400,2379.92 ; -400,2349.92 R4A.2@-400,2379.92 ; -400,2349.92 R4A.2@-400,2379.92
  other v2: -400,2299.92 -400,2299.92 -400,2299.92 -400,2299.92 -400,2299.92
NetK1B_11: K1B.11 R4B.2 U4B.4 | length 1593.7
  Top Layer (*.GTL) w10: 1000,2349.92 1045,2349.92 ; 1000,2349.92 1045,2349.92 ; 1000,2349.92 1045,2349.92 ; 1000,2349.92 1045,2349.92 ; 1000,2349.92 1045,2349.92 ; 1000,2349.92 1045,2349.92 ; 1045,2349.92 1055,2359.92 ; 1045,2349.92 1055,2359.92 ; 1045,2349.92 1055,2359.92 ; 1045,2349.92 1055,2359.92 ; 1045,2349.92 1055,2359.92 ; 1045,2349.92 1055,2359.92 ; 1055,2359.92 1055,2419.92 ; 1055,2359.92 1055,2419.92 ; 1055,2359.92 1055,2419.92 ; 1055,2359.92 1055,2419.92 ; 1055,2359.92 1055,2419.92 ; 1055,2359.92 1055,2419.92 ; 1055,2419.92 U4B.4@1102,2466.92 ; 1055,2419.92 U4B.4@1102,2466.92 ; 1055,2419.92 U4B.4@1102,2466.92 ; 1055,2419.92 U4B.4@1102,2466.92 ; 1055,2419.92 U4B.4@1102,2466.92 ; 1055,2419.92 U4B.4@1102,2466.92
  Top Layer (*.GTL) w50: v2(1000,2299.92) 1000,2349.92 ; v2(1000,2299.92) 1000,2349.92 ; v2(1000,2299.92) 1000,2349.92 ; v2(1000,2299.92) 1000,2349.92 ; v2(1000,2299.92) 1000,2349.92 ; v2(1000,2299.92) 1000,2349.92 ; 1000,2349.92 R4B.2@1000,2379.92 ; 1000,2349.92 R4B.2@1000,2379.92 ; 1000,2349.92 R4B.2@1000,2379.92 ; 1000,2349.92 R4B.2@1000,2379.92 ; 1000,2349.92 R4B.2@1000,2379.92 ; 1000,2349.92 R4B.2@1000,2379.92
  other v2: 1000,2299.92 1000,2299.92 1000,2299.92 1000,2299.92 1000,2299.92
NetK1C_11: K1C.11 R4C.2 U4C.4 | length 1593.7
  Top Layer (*.GTL) w10: 2400,2349.92 2445,2349.92 ; 2400,2349.92 2445,2349.92 ; 2400,2349.92 2445,2349.92 ; 2400,2349.92 2445,2349.92 ; 2400,2349.92 2445,2349.92 ; 2400,2349.92 2445,2349.92 ; 2445,2349.92 2455,2359.92 ; 2445,2349.92 2455,2359.92 ; 2445,2349.92 2455,2359.92 ; 2445,2349.92 2455,2359.92 ; 2445,2349.92 2455,2359.92 ; 2445,2349.92 2455,2359.92 ; 2455,2359.92 2455,2419.92 ; 2455,2359.92 2455,2419.92 ; 2455,2359.92 2455,2419.92 ; 2455,2359.92 2455,2419.92 ; 2455,2359.92 2455,2419.92 ; 2455,2359.92 2455,2419.92 ; 2455,2419.92 U4C.4@2502,2466.92 ; 2455,2419.92 U4C.4@2502,2466.92 ; 2455,2419.92 U4C.4@2502,2466.92 ; 2455,2419.92 U4C.4@2502,2466.92 ; 2455,2419.92 U4C.4@2502,2466.92 ; 2455,2419.92 U4C.4@2502,2466.92
  Top Layer (*.GTL) w50: v2(2400,2299.92) 2400,2349.92 ; v2(2400,2299.92) 2400,2349.92 ; v2(2400,2299.92) 2400,2349.92 ; v2(2400,2299.92) 2400,2349.92 ; v2(2400,2299.92) 2400,2349.92 ; v2(2400,2299.92) 2400,2349.92 ; 2400,2349.92 R4C.2@2400,2379.92 ; 2400,2349.92 R4C.2@2400,2379.92 ; 2400,2349.92 R4C.2@2400,2379.92 ; 2400,2349.92 R4C.2@2400,2379.92 ; 2400,2349.92 R4C.2@2400,2379.92 ; 2400,2349.92 R4C.2@2400,2379.92
  other v2: 2400,2299.92 2400,2299.92 2400,2299.92 2400,2299.92 2400,2299.92
NetK1D_11: K1D.11 R4D.2 U4D.4 | length 1593.7
  Top Layer (*.GTL) w10: 3800,2349.92 3845,2349.92 ; 3800,2349.92 3845,2349.92 ; 3800,2349.92 3845,2349.92 ; 3800,2349.92 3845,2349.92 ; 3800,2349.92 3845,2349.92 ; 3800,2349.92 3845,2349.92 ; 3845,2349.92 3855,2359.92 ; 3845,2349.92 3855,2359.92 ; 3845,2349.92 3855,2359.92 ; 3845,2349.92 3855,2359.92 ; 3845,2349.92 3855,2359.92 ; 3845,2349.92 3855,2359.92 ; 3855,2359.92 3855,2419.92 ; 3855,2359.92 3855,2419.92 ; 3855,2359.92 3855,2419.92 ; 3855,2359.92 3855,2419.92 ; 3855,2359.92 3855,2419.92 ; 3855,2359.92 3855,2419.92 ; 3855,2419.92 U4D.4@3902,2466.92 ; 3855,2419.92 U4D.4@3902,2466.92 ; 3855,2419.92 U4D.4@3902,2466.92 ; 3855,2419.92 U4D.4@3902,2466.92 ; 3855,2419.92 U4D.4@3902,2466.92 ; 3855,2419.92 U4D.4@3902,2466.92
  Top Layer (*.GTL) w50: v2(3800,2299.92) 3800,2349.92 ; v2(3800,2299.92) 3800,2349.92 ; v2(3800,2299.92) 3800,2349.92 ; v2(3800,2299.92) 3800,2349.92 ; v2(3800,2299.92) 3800,2349.92 ; v2(3800,2299.92) 3800,2349.92 ; 3800,2349.92 R4D.2@3800,2379.92 ; 3800,2349.92 R4D.2@3800,2379.92 ; 3800,2349.92 R4D.2@3800,2379.92 ; 3800,2349.92 R4D.2@3800,2379.92 ; 3800,2349.92 R4D.2@3800,2379.92 ; 3800,2349.92 R4D.2@3800,2379.92
  other v2: 3800,2299.92 3800,2299.92 3800,2299.92 3800,2299.92 3800,2299.92
NetK1E_11: K1E.11 R4E.2 U4E.4 | length 1593.7
  Top Layer (*.GTL) w10: 5200,2349.92 5245,2349.92 ; 5200,2349.92 5245,2349.92 ; 5200,2349.92 5245,2349.92 ; 5200,2349.92 5245,2349.92 ; 5200,2349.92 5245,2349.92 ; 5200,2349.92 5245,2349.92 ; 5245,2349.92 5255,2359.92 ; 5245,2349.92 5255,2359.92 ; 5245,2349.92 5255,2359.92 ; 5245,2349.92 5255,2359.92 ; 5245,2349.92 5255,2359.92 ; 5245,2349.92 5255,2359.92 ; 5255,2359.92 5255,2419.92 ; 5255,2359.92 5255,2419.92 ; 5255,2359.92 5255,2419.92 ; 5255,2359.92 5255,2419.92 ; 5255,2359.92 5255,2419.92 ; 5255,2359.92 5255,2419.92 ; 5255,2419.92 U4E.4@5302,2466.92 ; 5255,2419.92 U4E.4@5302,2466.92 ; 5255,2419.92 U4E.4@5302,2466.92 ; 5255,2419.92 U4E.4@5302,2466.92 ; 5255,2419.92 U4E.4@5302,2466.92 ; 5255,2419.92 U4E.4@5302,2466.92
  Top Layer (*.GTL) w50: v2(5200,2299.92) 5200,2349.92 ; v2(5200,2299.92) 5200,2349.92 ; v2(5200,2299.92) 5200,2349.92 ; v2(5200,2299.92) 5200,2349.92 ; v2(5200,2299.92) 5200,2349.92 ; v2(5200,2299.92) 5200,2349.92 ; 5200,2349.92 R4E.2@5200,2379.92 ; 5200,2349.92 R4E.2@5200,2379.92 ; 5200,2349.92 R4E.2@5200,2379.92 ; 5200,2349.92 R4E.2@5200,2379.92 ; 5200,2349.92 R4E.2@5200,2379.92 ; 5200,2349.92 R4E.2@5200,2379.92
  other v2: 5200,2299.92 5200,2299.92 5200,2299.92 5200,2299.92 5200,2299.92
NetK1F_11: K1F.11 R4F.2 U4F.4 | length 1593.7
  Top Layer (*.GTL) w10: 6600,2349.92 6645,2349.92 ; 6600,2349.92 6645,2349.92 ; 6600,2349.92 6645,2349.92 ; 6600,2349.92 6645,2349.92 ; 6600,2349.92 6645,2349.92 ; 6600,2349.92 6645,2349.92 ; 6645,2349.92 6655,2359.92 ; 6645,2349.92 6655,2359.92 ; 6645,2349.92 6655,2359.92 ; 6645,2349.92 6655,2359.92 ; 6645,2349.92 6655,2359.92 ; 6645,2349.92 6655,2359.92 ; 6655,2359.92 6655,2419.92 ; 6655,2359.92 6655,2419.92 ; 6655,2359.92 6655,2419.92 ; 6655,2359.92 6655,2419.92 ; 6655,2359.92 6655,2419.92 ; 6655,2359.92 6655,2419.92 ; 6655,2419.92 U4F.4@6702,2466.92 ; 6655,2419.92 U4F.4@6702,2466.92 ; 6655,2419.92 U4F.4@6702,2466.92 ; 6655,2419.92 U4F.4@6702,2466.92 ; 6655,2419.92 U4F.4@6702,2466.92 ; 6655,2419.92 U4F.4@6702,2466.92
  Top Layer (*.GTL) w50: v2(6600,2299.92) 6600,2349.92 ; v2(6600,2299.92) 6600,2349.92 ; v2(6600,2299.92) 6600,2349.92 ; v2(6600,2299.92) 6600,2349.92 ; v2(6600,2299.92) 6600,2349.92 ; v2(6600,2299.92) 6600,2349.92 ; 6600,2349.92 R4F.2@6600,2379.92 ; 6600,2349.92 R4F.2@6600,2379.92 ; 6600,2349.92 R4F.2@6600,2379.92 ; 6600,2349.92 R4F.2@6600,2379.92 ; 6600,2349.92 R4F.2@6600,2379.92 ; 6600,2349.92 R4F.2@6600,2379.92
  other v2: 6600,2299.92 6600,2299.92 6600,2299.92 6600,2299.92 6600,2299.92
NetK1G_11: K1G.11 R4G.2 U4G.4 | length 1593.7
  Top Layer (*.GTL) w10: -400.01,-2901.26 -355.01,-2901.26 ; -400.01,-2901.26 -355.01,-2901.26 ; -400.01,-2901.26 -355.01,-2901.26 ; -400.01,-2901.26 -355.01,-2901.26 ; -400.01,-2901.26 -355.01,-2901.26 ; -400.01,-2901.26 -355.01,-2901.26 ; -355.01,-2901.26 -345.01,-2891.26 ; -355.01,-2901.26 -345.01,-2891.26 ; -355.01,-2901.26 -345.01,-2891.26 ; -355.01,-2901.26 -345.01,-2891.26 ; -355.01,-2901.26 -345.01,-2891.26 ; -355.01,-2901.26 -345.01,-2891.26 ; -345.01,-2891.26 -345.01,-2831.26 ; -345.01,-2891.26 -345.01,-2831.26 ; -345.01,-2891.26 -345.01,-2831.26 ; -345.01,-2891.26 -345.01,-2831.26 ; -345.01,-2891.26 -345.01,-2831.26 ; -345.01,-2891.26 -345.01,-2831.26 ; -345.01,-2831.26 U4G.4@-298.01,-2784.26 ; -345.01,-2831.26 U4G.4@-298.01,-2784.26 ; -345.01,-2831.26 U4G.4@-298.01,-2784.26 ; -345.01,-2831.26 U4G.4@-298.01,-2784.26 ; -345.01,-2831.26 U4G.4@-298.01,-2784.26 ; -345.01,-2831.26 U4G.4@-298.01,-2784.26
  Top Layer (*.GTL) w50: v2(-400.01,-2951.26) -400.01,-2901.26 ; v2(-400.01,-2951.26) -400.01,-2901.26 ; v2(-400.01,-2951.26) -400.01,-2901.26 ; v2(-400.01,-2951.26) -400.01,-2901.26 ; v2(-400.01,-2951.26) -400.01,-2901.26 ; v2(-400.01,-2951.26) -400.01,-2901.26 ; -400.01,-2901.26 R4G.2@-400.01,-2871.26 ; -400.01,-2901.26 R4G.2@-400.01,-2871.26 ; -400.01,-2901.26 R4G.2@-400.01,-2871.26 ; -400.01,-2901.26 R4G.2@-400.01,-2871.26 ; -400.01,-2901.26 R4G.2@-400.01,-2871.26 ; -400.01,-2901.26 R4G.2@-400.01,-2871.26
  other v2: -400.01,-2951.26 -400.01,-2951.26 -400.01,-2951.26 -400.01,-2951.26 -400.01,-2951.26
NetK1H_11: K1H.11 R4H.2 U4H.4 | length 1593.7
  Top Layer (*.GTL) w10: 999.99,-2901.26 1044.99,-2901.26 ; 999.99,-2901.26 1044.99,-2901.26 ; 999.99,-2901.26 1044.99,-2901.26 ; 999.99,-2901.26 1044.99,-2901.26 ; 999.99,-2901.26 1044.99,-2901.26 ; 999.99,-2901.26 1044.99,-2901.26 ; 1044.99,-2901.26 1054.99,-2891.26 ; 1044.99,-2901.26 1054.99,-2891.26 ; 1044.99,-2901.26 1054.99,-2891.26 ; 1044.99,-2901.26 1054.99,-2891.26 ; 1044.99,-2901.26 1054.99,-2891.26 ; 1044.99,-2901.26 1054.99,-2891.26 ; 1054.99,-2891.26 1054.99,-2831.26 ; 1054.99,-2891.26 1054.99,-2831.26 ; 1054.99,-2891.26 1054.99,-2831.26 ; 1054.99,-2891.26 1054.99,-2831.26 ; 1054.99,-2891.26 1054.99,-2831.26 ; 1054.99,-2891.26 1054.99,-2831.26 ; 1054.99,-2831.26 U4H.4@1101.99,-2784.26 ; 1054.99,-2831.26 U4H.4@1101.99,-2784.26 ; 1054.99,-2831.26 U4H.4@1101.99,-2784.26 ; 1054.99,-2831.26 U4H.4@1101.99,-2784.26 ; 1054.99,-2831.26 U4H.4@1101.99,-2784.26 ; 1054.99,-2831.26 U4H.4@1101.99,-2784.26
  Top Layer (*.GTL) w50: v2(999.99,-2951.26) 999.99,-2901.26 ; v2(999.99,-2951.26) 999.99,-2901.26 ; v2(999.99,-2951.26) 999.99,-2901.26 ; v2(999.99,-2951.26) 999.99,-2901.26 ; v2(999.99,-2951.26) 999.99,-2901.26 ; v2(999.99,-2951.26) 999.99,-2901.26 ; 999.99,-2901.26 R4H.2@999.99,-2871.26 ; 999.99,-2901.26 R4H.2@999.99,-2871.26 ; 999.99,-2901.26 R4H.2@999.99,-2871.26 ; 999.99,-2901.26 R4H.2@999.99,-2871.26 ; 999.99,-2901.26 R4H.2@999.99,-2871.26 ; 999.99,-2901.26 R4H.2@999.99,-2871.26
  other v2: 999.99,-2951.26 999.99,-2951.26 999.99,-2951.26 999.99,-2951.26 999.99,-2951.26
NetK1I_11: K1I.11 R4I.2 U4I.4 | length 1593.7
  Top Layer (*.GTL) w10: 2399.99,-2901.26 2444.99,-2901.26 ; 2399.99,-2901.26 2444.99,-2901.26 ; 2399.99,-2901.26 2444.99,-2901.26 ; 2399.99,-2901.26 2444.99,-2901.26 ; 2399.99,-2901.26 2444.99,-2901.26 ; 2399.99,-2901.26 2444.99,-2901.26 ; 2444.99,-2901.26 2454.99,-2891.26 ; 2444.99,-2901.26 2454.99,-2891.26 ; 2444.99,-2901.26 2454.99,-2891.26 ; 2444.99,-2901.26 2454.99,-2891.26 ; 2444.99,-2901.26 2454.99,-2891.26 ; 2444.99,-2901.26 2454.99,-2891.26 ; 2454.99,-2891.26 2454.99,-2831.26 ; 2454.99,-2891.26 2454.99,-2831.26 ; 2454.99,-2891.26 2454.99,-2831.26 ; 2454.99,-2891.26 2454.99,-2831.26 ; 2454.99,-2891.26 2454.99,-2831.26 ; 2454.99,-2891.26 2454.99,-2831.26 ; 2454.99,-2831.26 U4I.4@2501.99,-2784.26 ; 2454.99,-2831.26 U4I.4@2501.99,-2784.26 ; 2454.99,-2831.26 U4I.4@2501.99,-2784.26 ; 2454.99,-2831.26 U4I.4@2501.99,-2784.26 ; 2454.99,-2831.26 U4I.4@2501.99,-2784.26 ; 2454.99,-2831.26 U4I.4@2501.99,-2784.26
  Top Layer (*.GTL) w50: v2(2399.99,-2951.26) 2399.99,-2901.26 ; v2(2399.99,-2951.26) 2399.99,-2901.26 ; v2(2399.99,-2951.26) 2399.99,-2901.26 ; v2(2399.99,-2951.26) 2399.99,-2901.26 ; v2(2399.99,-2951.26) 2399.99,-2901.26 ; v2(2399.99,-2951.26) 2399.99,-2901.26 ; 2399.99,-2901.26 R4I.2@2399.99,-2871.26 ; 2399.99,-2901.26 R4I.2@2399.99,-2871.26 ; 2399.99,-2901.26 R4I.2@2399.99,-2871.26 ; 2399.99,-2901.26 R4I.2@2399.99,-2871.26 ; 2399.99,-2901.26 R4I.2@2399.99,-2871.26 ; 2399.99,-2901.26 R4I.2@2399.99,-2871.26
  other v2: 2399.99,-2951.26 2399.99,-2951.26 2399.99,-2951.26 2399.99,-2951.26 2399.99,-2951.26
NetK1J_11: K1J.11 R4J.2 U4J.4 | length 1593.7
  Top Layer (*.GTL) w10: 3799.99,-2901.26 3844.99,-2901.26 ; 3799.99,-2901.26 3844.99,-2901.26 ; 3799.99,-2901.26 3844.99,-2901.26 ; 3799.99,-2901.26 3844.99,-2901.26 ; 3799.99,-2901.26 3844.99,-2901.26 ; 3799.99,-2901.26 3844.99,-2901.26 ; 3844.99,-2901.26 3854.99,-2891.26 ; 3844.99,-2901.26 3854.99,-2891.26 ; 3844.99,-2901.26 3854.99,-2891.26 ; 3844.99,-2901.26 3854.99,-2891.26 ; 3844.99,-2901.26 3854.99,-2891.26 ; 3844.99,-2901.26 3854.99,-2891.26 ; 3854.99,-2891.26 3854.99,-2831.26 ; 3854.99,-2891.26 3854.99,-2831.26 ; 3854.99,-2891.26 3854.99,-2831.26 ; 3854.99,-2891.26 3854.99,-2831.26 ; 3854.99,-2891.26 3854.99,-2831.26 ; 3854.99,-2891.26 3854.99,-2831.26 ; 3854.99,-2831.26 U4J.4@3901.99,-2784.26 ; 3854.99,-2831.26 U4J.4@3901.99,-2784.26 ; 3854.99,-2831.26 U4J.4@3901.99,-2784.26 ; 3854.99,-2831.26 U4J.4@3901.99,-2784.26 ; 3854.99,-2831.26 U4J.4@3901.99,-2784.26 ; 3854.99,-2831.26 U4J.4@3901.99,-2784.26
  Top Layer (*.GTL) w50: v2(3799.99,-2951.26) 3799.99,-2901.26 ; v2(3799.99,-2951.26) 3799.99,-2901.26 ; v2(3799.99,-2951.26) 3799.99,-2901.26 ; v2(3799.99,-2951.26) 3799.99,-2901.26 ; v2(3799.99,-2951.26) 3799.99,-2901.26 ; v2(3799.99,-2951.26) 3799.99,-2901.26 ; 3799.99,-2901.26 R4J.2@3799.99,-2871.26 ; 3799.99,-2901.26 R4J.2@3799.99,-2871.26 ; 3799.99,-2901.26 R4J.2@3799.99,-2871.26 ; 3799.99,-2901.26 R4J.2@3799.99,-2871.26 ; 3799.99,-2901.26 R4J.2@3799.99,-2871.26 ; 3799.99,-2901.26 R4J.2@3799.99,-2871.26
  other v2: 3799.99,-2951.26 3799.99,-2951.26 3799.99,-2951.26 3799.99,-2951.26 3799.99,-2951.26
NetK1K_11: K1K.11 R4K.2 U4K.4 | length 1593.7
  Top Layer (*.GTL) w10: 5199.99,-2901.26 5244.99,-2901.26 ; 5199.99,-2901.26 5244.99,-2901.26 ; 5199.99,-2901.26 5244.99,-2901.26 ; 5199.99,-2901.26 5244.99,-2901.26 ; 5199.99,-2901.26 5244.99,-2901.26 ; 5199.99,-2901.26 5244.99,-2901.26 ; 5244.99,-2901.26 5254.99,-2891.26 ; 5244.99,-2901.26 5254.99,-2891.26 ; 5244.99,-2901.26 5254.99,-2891.26 ; 5244.99,-2901.26 5254.99,-2891.26 ; 5244.99,-2901.26 5254.99,-2891.26 ; 5244.99,-2901.26 5254.99,-2891.26 ; 5254.99,-2891.26 5254.99,-2831.26 ; 5254.99,-2891.26 5254.99,-2831.26 ; 5254.99,-2891.26 5254.99,-2831.26 ; 5254.99,-2891.26 5254.99,-2831.26 ; 5254.99,-2891.26 5254.99,-2831.26 ; 5254.99,-2891.26 5254.99,-2831.26 ; 5254.99,-2831.26 U4K.4@5301.99,-2784.26 ; 5254.99,-2831.26 U4K.4@5301.99,-2784.26 ; 5254.99,-2831.26 U4K.4@5301.99,-2784.26 ; 5254.99,-2831.26 U4K.4@5301.99,-2784.26 ; 5254.99,-2831.26 U4K.4@5301.99,-2784.26 ; 5254.99,-2831.26 U4K.4@5301.99,-2784.26
  Top Layer (*.GTL) w50: v2(5199.99,-2951.26) 5199.99,-2901.26 ; v2(5199.99,-2951.26) 5199.99,-2901.26 ; v2(5199.99,-2951.26) 5199.99,-2901.26 ; v2(5199.99,-2951.26) 5199.99,-2901.26 ; v2(5199.99,-2951.26) 5199.99,-2901.26 ; v2(5199.99,-2951.26) 5199.99,-2901.26 ; 5199.99,-2901.26 R4K.2@5199.99,-2871.26 ; 5199.99,-2901.26 R4K.2@5199.99,-2871.26 ; 5199.99,-2901.26 R4K.2@5199.99,-2871.26 ; 5199.99,-2901.26 R4K.2@5199.99,-2871.26 ; 5199.99,-2901.26 R4K.2@5199.99,-2871.26 ; 5199.99,-2901.26 R4K.2@5199.99,-2871.26
  other v2: 5199.99,-2951.26 5199.99,-2951.26 5199.99,-2951.26 5199.99,-2951.26 5199.99,-2951.26
NetK1L_11: K1L.11 R4L.2 U4L.4 | length 1593.7
  Top Layer (*.GTL) w10: 6599.99,-2901.26 6644.99,-2901.26 ; 6599.99,-2901.26 6644.99,-2901.26 ; 6599.99,-2901.26 6644.99,-2901.26 ; 6599.99,-2901.26 6644.99,-2901.26 ; 6599.99,-2901.26 6644.99,-2901.26 ; 6599.99,-2901.26 6644.99,-2901.26 ; 6644.99,-2901.26 6654.99,-2891.26 ; 6644.99,-2901.26 6654.99,-2891.26 ; 6644.99,-2901.26 6654.99,-2891.26 ; 6644.99,-2901.26 6654.99,-2891.26 ; 6644.99,-2901.26 6654.99,-2891.26 ; 6644.99,-2901.26 6654.99,-2891.26 ; 6654.99,-2891.26 6654.99,-2831.26 ; 6654.99,-2891.26 6654.99,-2831.26 ; 6654.99,-2891.26 6654.99,-2831.26 ; 6654.99,-2891.26 6654.99,-2831.26 ; 6654.99,-2891.26 6654.99,-2831.26 ; 6654.99,-2891.26 6654.99,-2831.26 ; 6654.99,-2831.26 U4L.4@6701.99,-2784.26 ; 6654.99,-2831.26 U4L.4@6701.99,-2784.26 ; 6654.99,-2831.26 U4L.4@6701.99,-2784.26 ; 6654.99,-2831.26 U4L.4@6701.99,-2784.26 ; 6654.99,-2831.26 U4L.4@6701.99,-2784.26 ; 6654.99,-2831.26 U4L.4@6701.99,-2784.26
  Top Layer (*.GTL) w50: v2(6599.99,-2951.26) 6599.99,-2901.26 ; v2(6599.99,-2951.26) 6599.99,-2901.26 ; v2(6599.99,-2951.26) 6599.99,-2901.26 ; v2(6599.99,-2951.26) 6599.99,-2901.26 ; v2(6599.99,-2951.26) 6599.99,-2901.26 ; v2(6599.99,-2951.26) 6599.99,-2901.26 ; 6599.99,-2901.26 R4L.2@6599.99,-2871.26 ; 6599.99,-2901.26 R4L.2@6599.99,-2871.26 ; 6599.99,-2901.26 R4L.2@6599.99,-2871.26 ; 6599.99,-2901.26 R4L.2@6599.99,-2871.26 ; 6599.99,-2901.26 R4L.2@6599.99,-2871.26 ; 6599.99,-2901.26 R4L.2@6599.99,-2871.26
  other v2: 6599.99,-2951.26 6599.99,-2951.26 6599.99,-2951.26 6599.99,-2951.26 6599.99,-2951.26
NetL3_1: L3.1 U23.1
NetP1_1: P1.1 R8.1 R9.2 | length 261.4
  Bottom Layer w10: R9.2@3750,3795 3751,3796 P1.1@4011,3796
NetP1_3: P1.3 R10.1 R11.2 | length 256.4
  Bottom Layer w10: R11.2@3755,3995 3756,3996 P1.3@4011,3996
NetR29_2: R29.2 R30.2 U21.9 | length 212.9
  Top Layer (*.GTL) w10: v3(4185.8,-4431.73) 4185.8,-4383.73 R29.2@4188.8,-4380.73
  Bottom Layer w10: U21.9@4185.65,-4471.56 v3@4185.65,-4431.88 ; v3(4185.8,-4431.73) v3@4185.65,-4431.88 ; R30.2@4208.8,-4320.73 4208.8,-4347.73 4185.65,-4370.88 v3@4185.65,-4431.88
NetR31_2: R31.2 U21.10 | length 204.2
  Bottom Layer w10: U21.10@4203.37,-4471.56 4206.8,-4468.13 4206.8,-4378.73 4230.8,-4354.73 4237.53,-4354.73 4242.8,-4349.46 4242.8,-4342.73 4264.8,-4320.73 R31.2@4288.8,-4320.73
NetR32_1: R32.1 R34.2 U21.2 | length 129.6
  Top Layer (*.GTL) w10: R34.2@4213.8,-4635.73 4215.8,-4637.73 v3(4252.8,-4637.73)
  Bottom Layer w10: U21.2@4221.08,-4585.73 4221.08,-4633.45 4216.8,-4637.73 v3(4252.8,-4637.73)
NetR33_2: R33.2 U21.1 | length 85.7
  Bottom Layer w10: U21.1@4238.8,-4585.73 4253.8,-4585.73 R33.2@4303.8,-4635.73
NetR35_1: R35.1 R37.2 U23.5 | length 148.2
  Top Layer (*.GTL) w10: R37.2@2613.98,-4760.08 2649.98,-4760.08 v3(2672.98,-4783.08) 2638.98,-4817.08 R35.1@2638.98,-4825.08
  Bottom Layer w10: v3(2672.98,-4783.08) 2673.37,-4782.69 U23.5@2673.37,-4759.61
NetR37_1: R37.1 R40.2 U23.7 | length 440.7
  Top Layer (*.GTL) w10: v1(2641,-4718.08) 2624,-4718.08 2613.98,-4708.06 R37.1@2613.98,-4670.08 2776.98,-4670.08 2819.98,-4713.08 v3(2819.98,-4773.08)
  Bottom Layer w10: v1(2641,-4718.08) 2643.16,-4720.24 U23.7@2673.37,-4720.24 ; v3(2819.98,-4773.08) 2834.98,-4758.08 R40.2@2867.98,-4758.08 ; R40.2@2868.82,-4739.92 R40.2@2868.98,-4740.08
NetRN1_2: RN1.2 U5.B63 | length 306.1
  Bottom Layer w8: RN1.2@3180.71,-1192.48 3181.71,-1191.48 3217,-1191.48 3239,-1213.48 3239,-1316.58 3299.15,-1376.73 U5.B63@3349.28,-1376.73
NetRN1_4: RN1.4 U5.B61 | length 324.8
  Bottom Layer w8: RN1.4@3180.71,-1160.98 3228.5,-1160.98 3251,-1183.48 3251,-1311.61 3296.43,-1357.05 U5.B61@3349.28,-1357.05
NetRN1_6: RN1.6 U5.B59 | length 173.1
  Bottom Layer w8: RN1.6@3180.71,-1129.49 3260.01,-1129.49 3271.03,-1140.51 U5.B59@3349.28,-1140.51
NetRN1_8: RN1.8 U5.B57 | length 178
  Bottom Layer w8: RN1.8@3180.71,-1097.99 3261.51,-1097.99 3284.35,-1120.83 U5.B57@3349.28,-1120.83
NetRN2_2: RN2.2 U5.B79 | length 139.9
  Bottom Layer w8: RN2.2@3210.71,-1537.48 3213.98,-1534.21 U5.B79@3349.28,-1534.21
NetRN2_4: RN2.4 U5.B77 | length 142.1
  Bottom Layer w8: RN2.4@3210.71,-1505.98 3282.5,-1505.98 3291.05,-1514.53 U5.B77@3349.28,-1514.53
NetRN2_6: RN2.6 U5.B75 | length 147
  Bottom Layer w8: RN2.6@3210.71,-1474.49 3277.01,-1474.49 3297.36,-1494.84 U5.B75@3349.28,-1494.84
NetRN2_8: RN2.8 U5.B73 | length 153.1
  Bottom Layer w8: RN2.8@3210.71,-1442.99 3212.22,-1441.48 3275,-1441.48 3308.68,-1475.16 U5.B73@3349.28,-1475.16
NetRN3_2: RN3.2 U5.B89 | length 184.3
  Bottom Layer w8: RN3.2@3210.71,-1717.48 3247,-1717.48 3268,-1696.48 3268,-1678.48 3313.84,-1632.64 U5.B89@3349.28,-1632.64
NetRN3_4: RN3.4 U5.B87 | length 168.8
  Bottom Layer w8: RN3.4@3210.71,-1685.98 3237.5,-1685.98 3310.53,-1612.95 U5.B87@3349.28,-1612.95
NetRN3_6: RN3.6 U5.B85 | length 163.9
  Bottom Layer w8: RN3.6@3210.71,-1654.49 3243.99,-1654.49 3305.21,-1593.27 U5.B85@3349.28,-1593.27
NetRN3_8: RN3.8 U5.B83 | length 159
  Bottom Layer w8: RN3.8@3210.71,-1622.99 3256.69,-1622.99 3306.1,-1573.58 U5.B83@3349.28,-1573.58
PWR_OFF1: K1A.1 Q1A.3 U5.B42 | length 8195
  Top Layer (*.GTL) w5: K1A.1@-100,2779.92 K1A.1@-82.08,2762
  Top Layer (*.GTL) w10: K1A.1@-100,2779.92 Q1A.3@-100,3018.66
  Mid-Layer 1 w5: v1@-83,-324.17 2133.5,-324.17 2143.17,-314.5 2156.83,-314.5 2166.5,-324.17 2166.5,-327 2262.46,-327 2320.46,-385 2601.46,-385 2692.46,-476 3003.54,-476 3022.54,-457 3153.21,-457 3227.21,-383 3424.46,-383 3450.57,-409.12 3573.88,-409.12 3584,-419.24 v1(3624.26,-419.24)
  Bottom Layer w5: U5.B42@3592.59,-963.35 3624,-963.35 3715,-872.35 3715,-485.09 3649.15,-419.24 v1(3624.26,-419.24)
  Bottom Layer w10: K1A.1@-100,2779.92 24,2655.92 24,1511 -45,1442 -184,1442 -263,1363 -263,189 -83,9 v1(-83,-326)